# Altium PCB Handheld Receiver.PcbDoc
Units mil, origin at the board's own origin, x right, y up, seen from the top; angles counter-clockwise.
Board outline 1968.5 x 1968.5 mil, 2 copper layers (Top Layer, Bottom Layer); 28 components, 28 nets, 145 pads, 17 vias.
Unrouted connection lines stored in the file: 1.
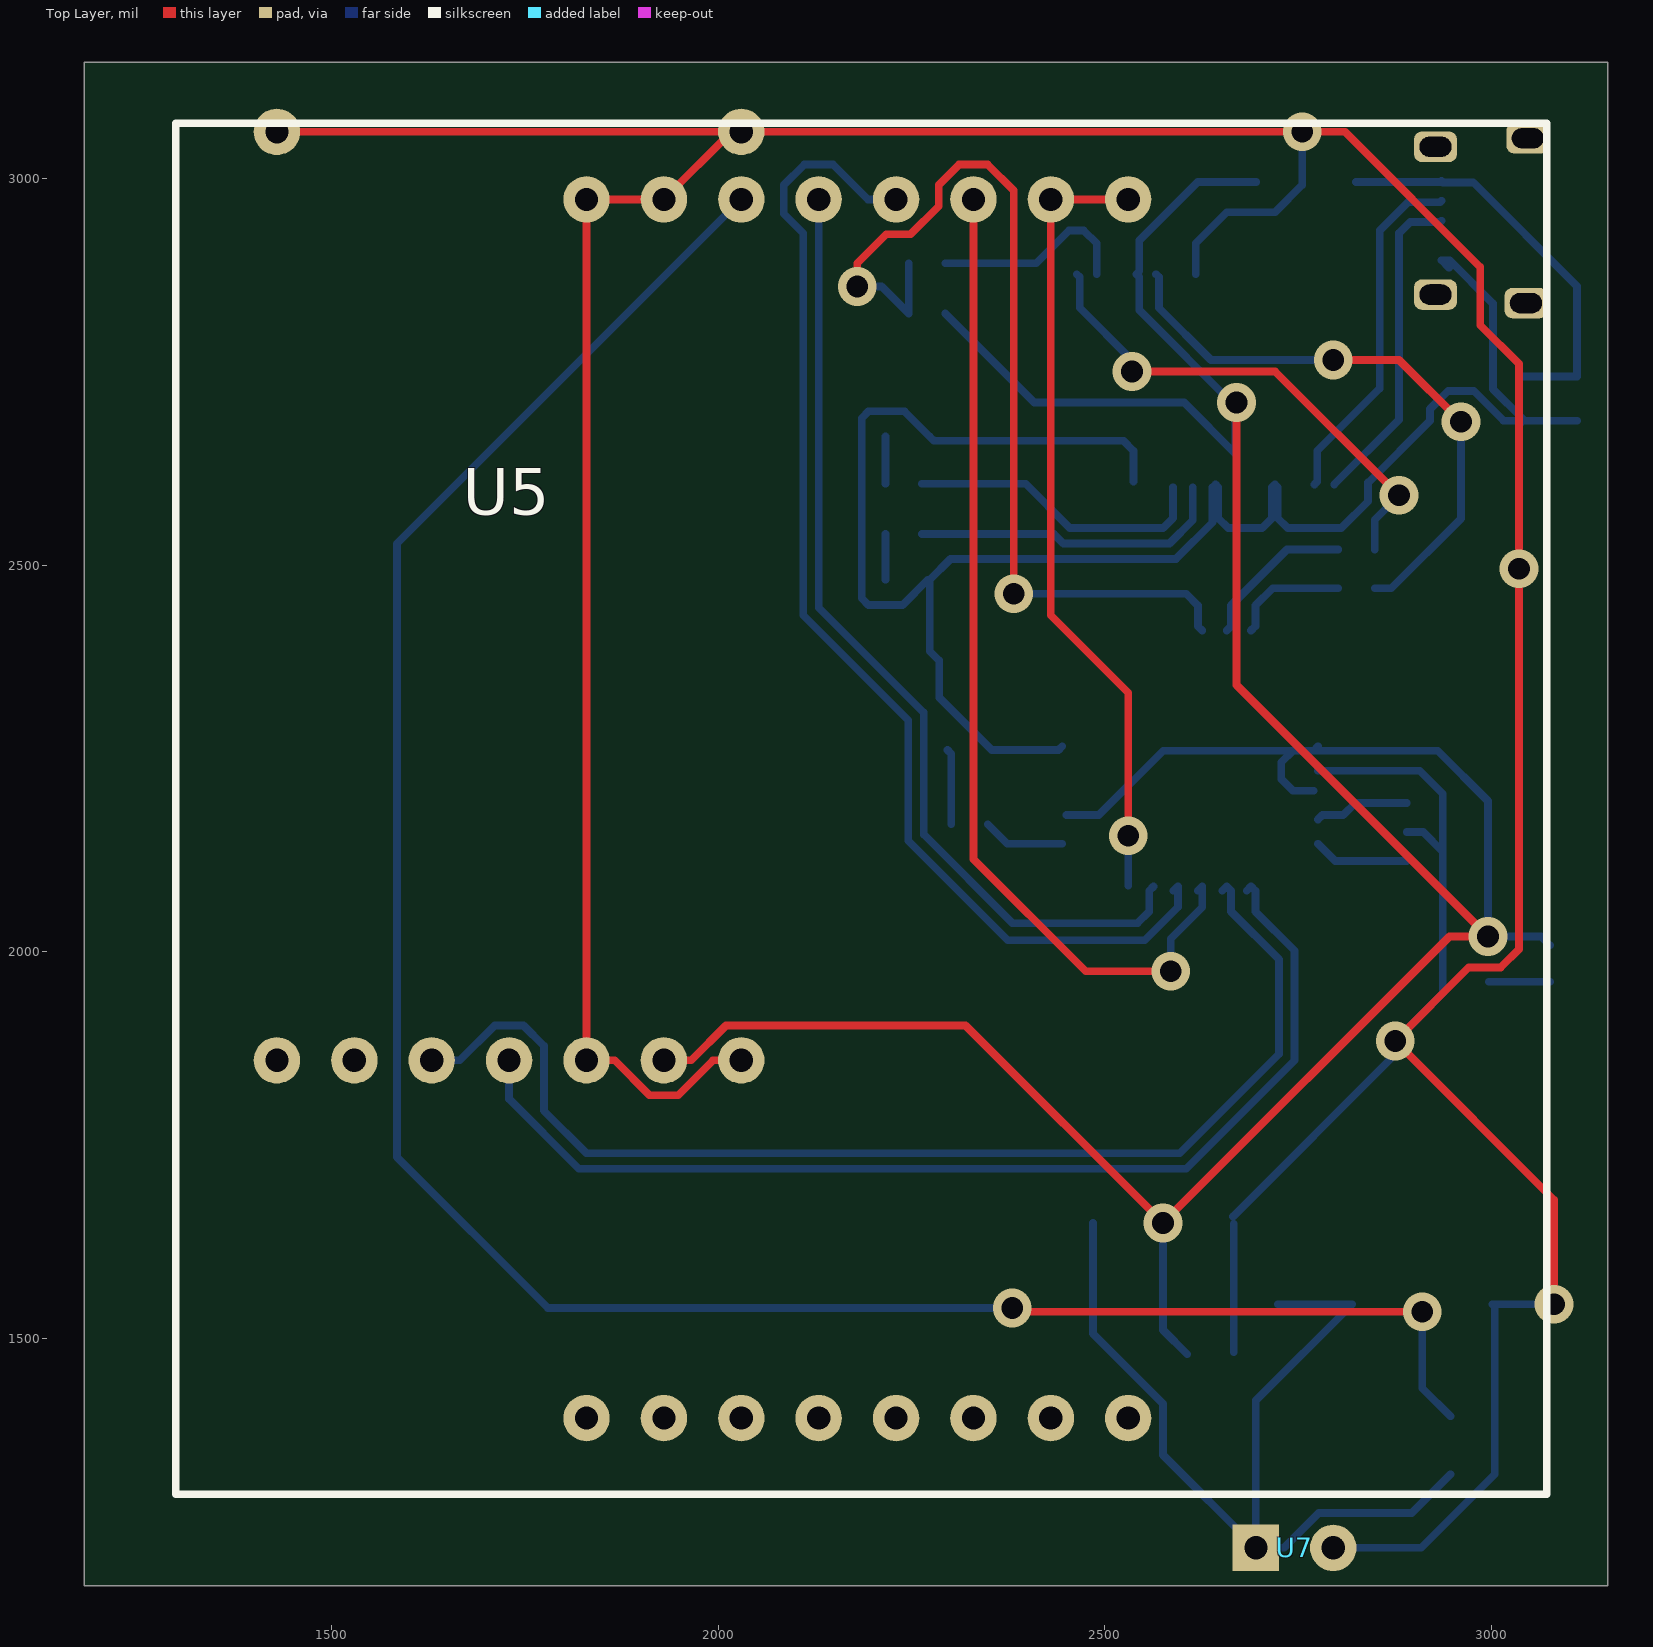
[diagram p0: Top Layer view]
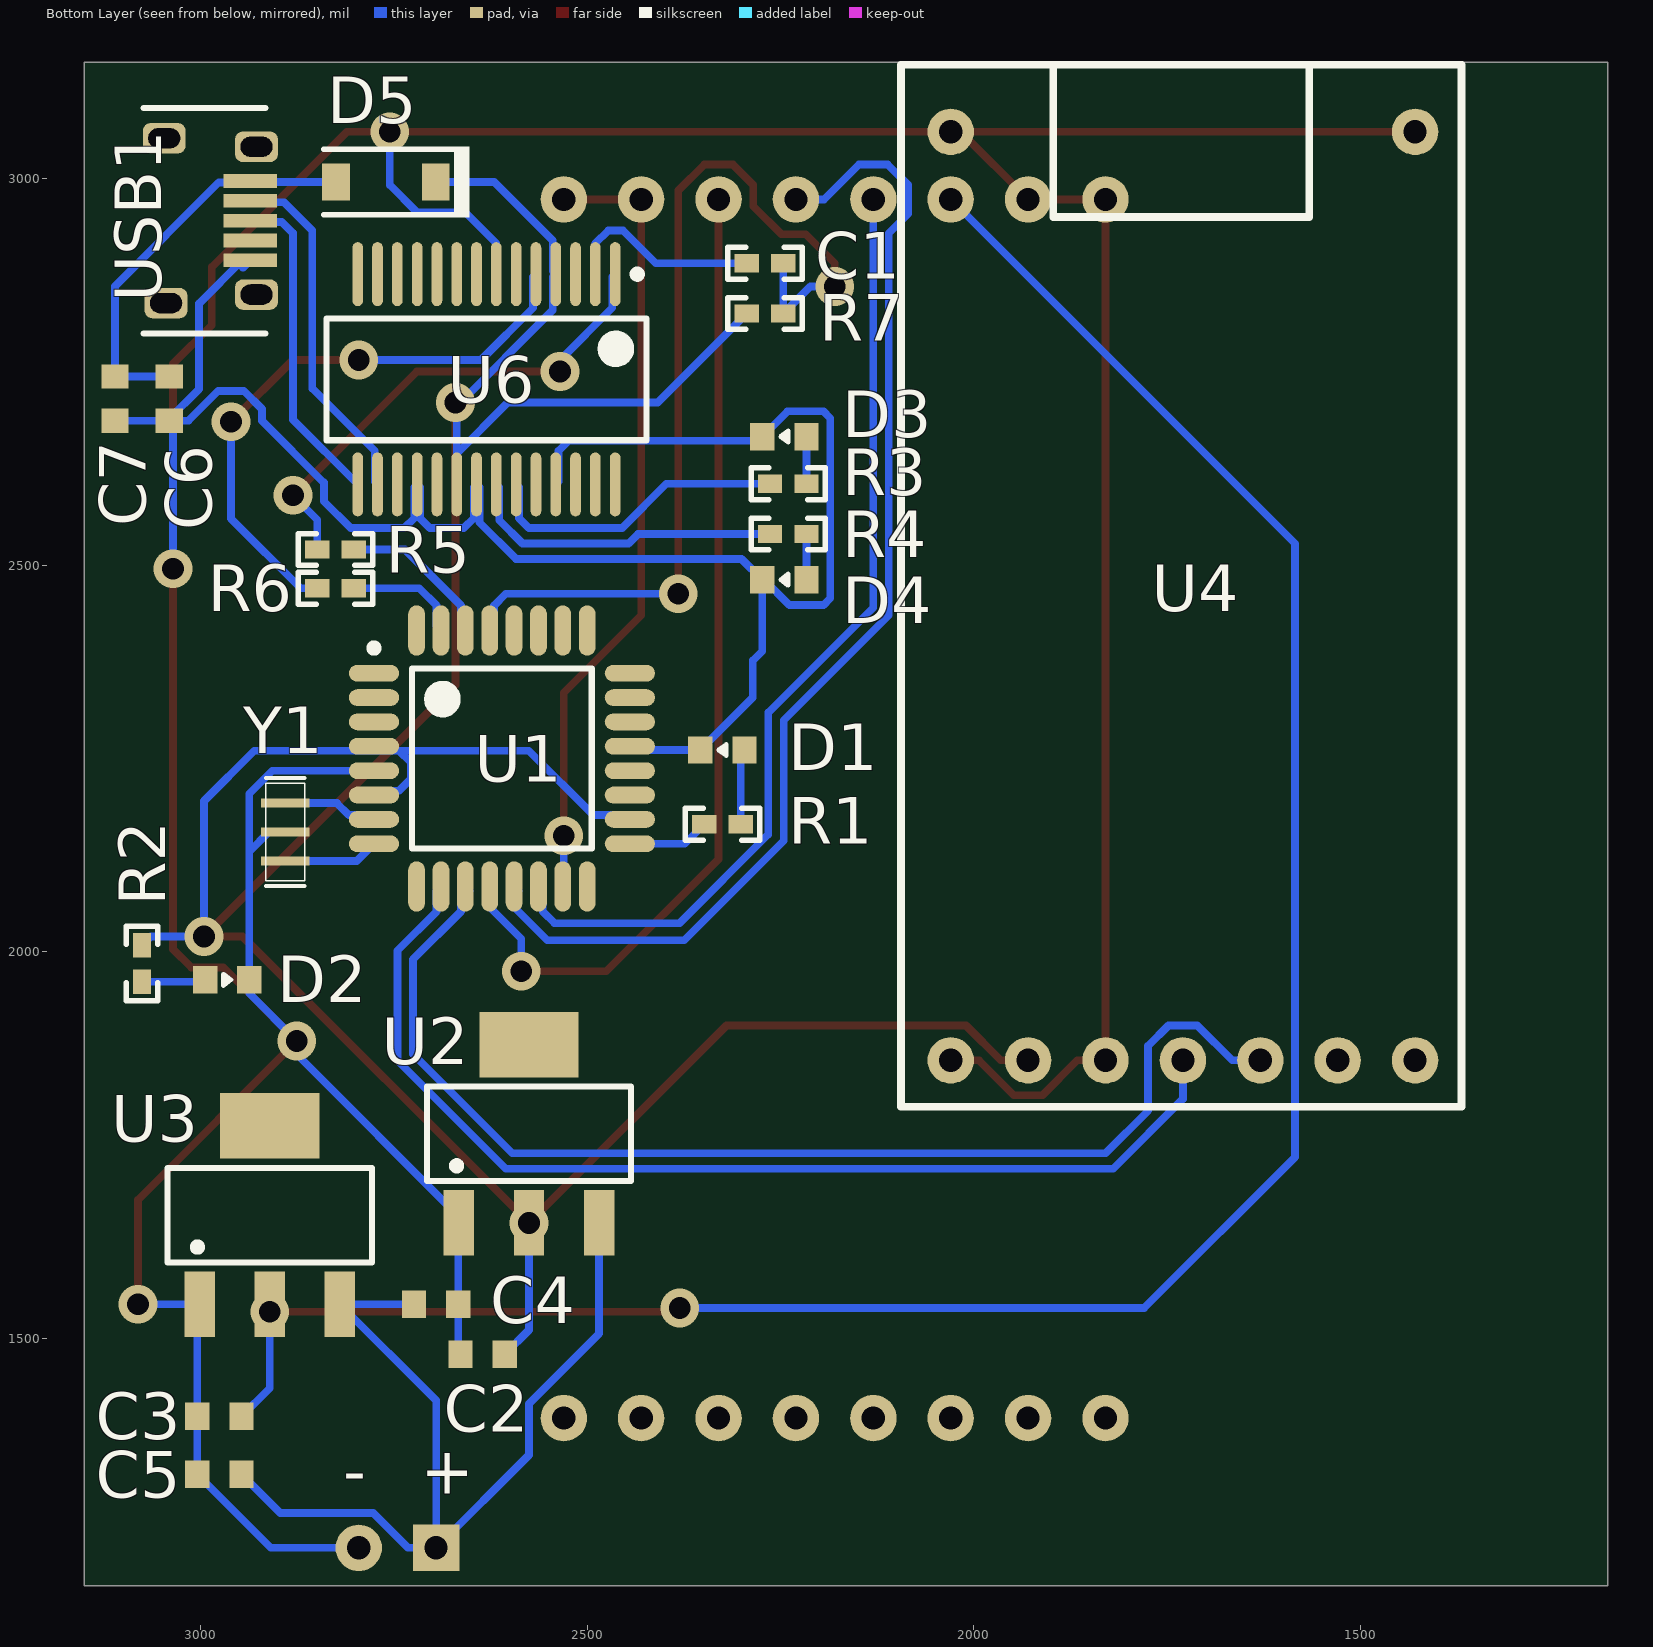
[diagram p1: Bottom Layer view, seen from below]
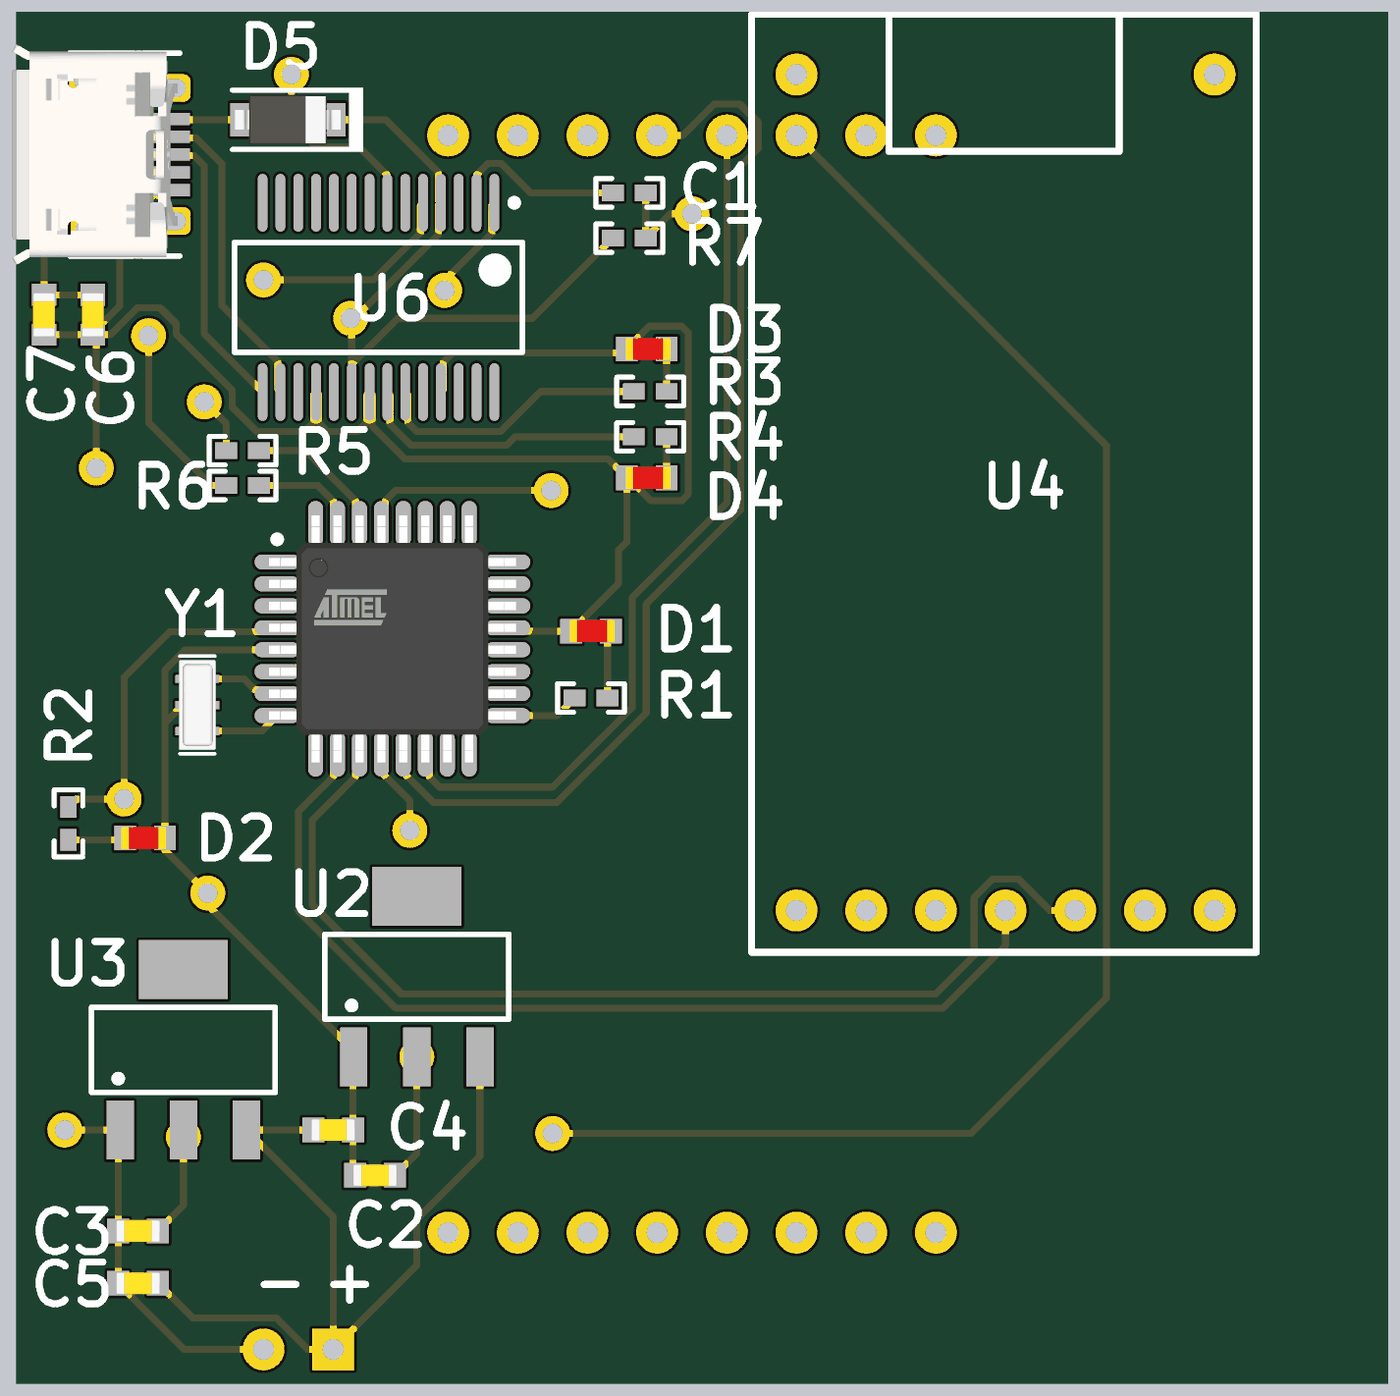
[diagram p2: 3D render of the assembled board from below, using the file's embedded part models]

## Layer stack, top to bottom
Top Solder: solder mask 0.4, Solder Resist, Dk 3.5
Top Layer: signal copper 1.4
Dielectric 1: dielectric 12.6, FR-4, Dk 4.8
Bottom Layer: signal copper 1.4
Bottom Solder: solder mask 0.4, Solder Resist, Dk 3.5

## Board outline
1181.1,1181.1 1181.1,3149.61 3149.61,3149.61 3149.61,1181.1

## Design rules (kind name [scope] priority, off if disabled: settings)
Clearance [All] p1: gap=10
PolygonConnect [All] p1: connectstyle=Relief reliefconductorwidth=10 reliefentries=4 polygonreliefangle="90 Angle" airgapwidth=10
RoomDefinition "Handheld Receiver" [InComponentClass('Handheld Receiver')] p1: confinementstyle=ConfineIn formatcopy=TRUE lockcomponents=FALSE outline 1175,1181.1 3149.61,1181.1 3149.61,3149.61 1175,3149.61
RoutingVias [All] p1: holewidth=28 width=50 viastyle="Through Hole" minholewidth=28 minwidth=50 maxholewidth=28 maxwidth=50
SolderMaskExpansion [All] p1: expansion=4
Width [All] p1: maxlimit=10 minlimit=10 preferedwidth=10
29 further rules are at their usual default settings.

## Components (designator, comment, footprint, x,y, rotation, side; value= is the part's Value field where it differs from the comment)
C1 "0.1µF" 0402 2270,2890 r0 bottom
C2 "10µF" CAP-0603 2635,1480 r0 bottom
C3 "10µF" CAP-0603 2975,1400 r0 bottom
C4 "0.1µF" CAP-0603 2695,1545 r180 bottom
C5 "0.1µF" CAP-0603 2975,1325 r0 bottom
C6 "10µF" CAP-0603 3040,2715 r270 bottom
C7 "0.1µF" CAP-0603 3110,2715 r270 bottom
D1 "Yellow" "LED 0603 Red" 2325,2260 r0 bottom
D2 "Red" "LED 0603 Red" 2965,1965 r180 bottom
D3 "Blue" "LED 0603 Red" 2245,2665 r0 bottom
D4 "Green" "LED 0603 Red" 2245,2480 r0 bottom
D5 "1N5819HW-7-F" SOD-123 2760,2995 r0 bottom
R1 "1k" 0402 2325,2165 r180 bottom
R2 "1k" 0402 3075,1985 r90 bottom
R3 "1k" 0402 2240,2605 r0 bottom
R4 "1k" 0402 2240,2540 r0 bottom
R5 "1k" 0402 2825,2520 r0 bottom
R6 "1k" 0402 2825,2470 r0 bottom
R7 "1k" 0402 2270,2825 r180 bottom
U1 "#NAME?" TQFP32 2610,2250 r180 bottom
U2 "5V Regulator" SOT233 2575,1765 r90 bottom
U3 "3.3V Regulator" SOT233 2910,1660 r90 bottom
U4 "LoRa" DRF1278DM 1370,1800 r90 bottom
U5 "Nokia 5110" NOKIA5110 2185.04,2185.04 r0 top
U6 "FT232RL" SSOP-28_N 2630,2740 r270 bottom
U7 "Battery Connector" BATTERY_PADS 2695,1230 r0 top
USB1 "USB connector" "USB MICRO-B" 2935,2945 r270 bottom
Y1 "Crystal" CSTCE 2890,2155 r270 bottom

## Footprints (in the part's own frame and the unit in brackets; to place one, negate y for a bottom-side part, rotate by r counter-clockwise, add the part's x,y. Pads: shape width x height; smd on the part's side, far side on the other; paste and mask are expansions set on the pad)
0402 [mm]
  rect 0.8x0.6 smd: 1(-0.6,0) 2(0.6,0)
  silkscreen extent -1.22,-0.52 1.22,0.52, body extent -0.55,-0.3 0.55,0.3, height 0.6
BATTERY_PADS [mil]
  rect 60x60 hole 30: 1(0,0)
  round 60 hole 30: 2(100,0)
CAP-0603 [mm] "Non-polarized 0603 (1608) chip capacitor"
  rect 0.8x0.9 smd: 1(-0.725,0) 2(0.725,0)
  body extent -0.8,-0.4 0.8,0.4, height 0.86
CSTCE [mm]
  rect 0.3x1.6 smd: 1(0,0) 2(-0.95,0) 3(0.95,0)
  silkscreen extent -1.78,-0.64 1.78,0.64, body extent -1.6,-0.64 1.6,0.66, height 1.02
DRF1278DM [mil]
  round 60 hole 30: 1(60,60) 2(60,160) 3(60,260) 4(60,360) 5(60,460) 6(60,560) 7(60,660) 7(1259.84,60) 7(1259.84,660)
  silkscreen extent 0,0 1346,724
"LED 0603 Red" [mm]
  rect 0.8x0.9 smd: 1(-0.725,-0.025) 2(0.725,-0.025)
  silkscreen extent -0.13,-0.21 0.12,0.16, body extent -0.86,-0.43 0.76,0.37, height 1.1
NOKIA5110 [mil]
  round 60 hole 30: 1(-355,787.4) 2(-255,787.4) 3(-155,787.4) 4(-55,787.4) 5(45,787.4) 6(145,787.4) 7(245,787.4) 8(345,787.4) 9(-355,-787.4) 10(-255,-787.4) 11(-155,-787.4) 12(-55,-787.4) 13(45,-787.4) 14(145,-787.4) 15(245,-787.4) 16(345,-787.4)
  silkscreen extent -886,-886 886,886
SOD-123 [mm]
  rect 0.915x1.22 smd: 1(-1.637,0) 2(1.637,0)
  silkscreen extent -2.74,-1.17 2.03,1.17, body extent -1.93,-0.9 1.93,0.9, height 1.35
SOT233 [mm] "SOT223 4-Leads"
  rect 2.15x1 smd: 1(-2.925,2.3) 2(-2.925,0) 3(-2.925,-2.3)
  rect 2.15x3.25 smd: 4(2.925,0)
  silkscreen extent -1.55,-3.35 1.55,3.35, body extent -1.85,-3.35 1.85,3.35, height 1.8
SSOP-28_N [mm] "SOP, 28-Leads, Body 10.2x5.3mm, Pitch 0.65mm, IPC Medium Density"
  oval 2.1x0.35 smd: 1(-3.45,4.225) 2(-3.45,3.575) 3(-3.45,2.925) 4(-3.45,2.275) 5(-3.45,1.625) 6(-3.45,0.975) 7(-3.45,0.325) 8(-3.45,-0.325) 9(-3.45,-0.975) 10(-3.45,-1.625) 11(-3.45,-2.275) 12(-3.45,-2.925) 13(-3.45,-3.575) 14(-3.45,-4.225) 15(3.45,-4.225) 16(3.45,-3.575) 17(3.45,-2.925) 18(3.45,-2.275) 19(3.45,-1.625) 20(3.45,-0.975) 21(3.45,-0.325) 22(3.45,0.325) 23(3.45,0.975) 24(3.45,1.625) 25(3.45,2.275) 26(3.45,2.925) 27(3.45,3.575) 28(3.45,4.225)
  silkscreen extent -3.57,-5.25 2,5.25, body extent -2.8,-5.25 2.8,5.25, height 2
TQFP32 [mm] "Thin QFP, 32-Leads, Body 7x7mm, Pitch 0.8mm, IPC Medium Density"
  oval 1.65x0.55 smd: 1(-4.2,2.8) 2(-4.2,2) 3(-4.2,1.2) 4(-4.2,0.4) 5(-4.2,-0.4) 6(-4.2,-1.2) 7(-4.2,-2) 8(-4.2,-2.8) 17(4.2,-2.8) 18(4.2,-2) 19(4.2,-1.2) 20(4.2,-0.4) 21(4.2,0.4) 22(4.2,1.2) 23(4.2,2) 24(4.2,2.8)
  oval 0.55x1.65 smd: 9(-2.8,-4.2) 10(-2,-4.2) 11(-1.2,-4.2) 12(-0.4,-4.2) 13(0.4,-4.2) 14(1.2,-4.2) 15(2,-4.2) 16(2.8,-4.2) 25(2.8,4.2) 26(2,4.2) 27(1.2,4.2) 28(0.4,4.2) 29(-0.4,4.2) 30(-1.2,4.2) 31(-2,4.2) 32(-2.8,4.2)
  silkscreen extent -4.33,-2.95 2.95,3.75, body extent -4.51,-4.51 4.51,4.51, height 1.15
"USB MICRO-B" [mm] "FCI 10103594-0001LF"
  rect 0.45x1.75 smd: 1(-1.3,0) 2(-0.65,0) 3(0,0) 4(0.65,0) 5(1.3,0)
  rrect50% 1x1.4 hole 0.66 slot 1.05 at 90 deg: SH(-2.705,-2.83) SH(-2.425,0.2) SH(2.425,0.2) SH(2.705,-2.77)
  silkscreen extent -3.7,-3.5 3.7,0.5, body extent -4.02,-5.6 4.02,0.43, height 2.89

## Part data
C1 C2 C3 C4 C5 C6 C7: library part Capacitor, "CAP"
D1 D2 D3 D4: library part LED, "LED"
D5: "Diode, Schottky, 40V, 1A, SOD-123"
R1 R2 R3 R4 R5 R6 R7: library part Resistor, "Resistor"
U1: library part ATmega328P-AU, "8-bit AVR Microcontroller, 32KB Flash, 1KB EEPROM, 2KB SRAM, 32-pin TQFP, Industrial Grade (-40°C to 85°C)"
U2 U3: library part SOT223-REG, "SOT223 regulator"
U4: library part DRF1278DM, "LoRa module"
U5: "Nokia 5110 LCD module"
U6: library part FT232RL-Reel, "USB UART Asynchronous Serial Data Transfer Chip, SSOP-28, Tape and Reel"
USB1: "USB Connector"
Y1: "16Mhz"

## Via types
v1: diameter 50, hole 28, Top Layer to Bottom Layer, 17 vias

## Nets (pads, with @x,y where several pads share a name; then routed paths per layer and width w, separated by ;. In a path a pad name is that pad's centre, name@x,y a point inside that pad or via, vN(x,y) a via of type N, cw(c..) or ccw(c..) an arc to the next point about the centre after c; other vN are vias at no path point)
3.3V: C3.1 U3.2 U5.3 | length 2982.5
  Top Layer w10: v1@2385,1535 v1(2910,1535)
  Bottom Layer w10: U5.3 1585,2527.4 1585,1735 1780,1540 v1(2380,1540) ; U3.2 v1(2910,1535) 2910,1436.46 C3.1
5V: C2.1 D5.1 R2.2 R7.1 U1.4 U1.6 U1.18 U2.2 U4.6 U6.4 U6.20 | length 4277.2
  Top Layer w10: U4.6 1965.36,1860 2010.36,1905 2319.84,1905 v1(2575,1649.84) 2945.16,2020 v1(2995,2020) 2670,2345 v1(2670,2710)
  Bottom Layer w10: R7.1 2408.62,2710 2602.37,2710 2668.39,2643.99 2668.39,2705.37 2544.13,2829.62 2544.13,2872.13 U6.4 2544.13,2879.53 2544.13,2919.34 2619.79,2995 D5.1 ; U1.18@2450.32,2176.93 2492.13,2176.93 2575.28,2260.08 2743,2260.08 ; v1(2575,1649.84) 2575,1511.46 C2.1 ; U1.6@2769.68,2208.43 2743,2208.43 2727.87,2223.55 2727.87,2244.95 2743,2260.08 ; U1.4 U1.4@2769.68,2260.08 ; R2.2 3063.62,2020 v1(2995,2020) 2995,2195 2929.92,2260.08 U1.4@2769.68,2260.08 ; 2743,2260.08 U1.4@2769.68,2260.08
GND: C2.2 C3.2 C4.2 C5.2 C6.2 C7.2 D1.2 D2.2 D3.2 D4.2 U1.5 U1.21 U2.1 U3.1 U4.5 U4.7 U5.1 U5.2 U6.7 U6.18 U6.21 U6.25 U7.2 USB1.5 Y1.1 | length 9343.4
  Top Layer w10: U4.7@1430,3059.84 U4.7@2017.44,3059.84 ; U4.7@2030,1860 1993.64,1860 1948.64,1815 1911.36,1815 1866.36,1860 U4.5 U4.5 U5.1 U5.2 U4.7@2017.44,3059.84 ; v1(3080.16,1544.84) 3080.16,1679.84 v1(2875,1885) 2970,1980 3011.57,1980 3035,2003.43 v1(3035,2495) 3035,2760 2985,2810 2985,2885 2810.16,3059.84 2030,3059.84 U4.7@2017.44,3059.84
  Bottom Layer w10: U1.21 2439.88,2260.98 D1.2 2285.7,2328.82 2285.7,2376.55 2273.54,2388.72 D4.2 ; U6.25@2536.73,2607.87 2536.73,2647.69 2523.91,2660.51 2279.01,2660.51 D3.2 2240.82,2698.7 2194.49,2698.7 2185.63,2689.84 2185.63,2457.13 2194.49,2448.27 2238.41,2448.27 2271.13,2480.98 D4.2 ; U6.7 2617.2,2915.64 2657.55,2955.98 2719.76,2955.98 2755,2991.23 v1(2755,3060) ; U6.21@2639.09,2600.47 2639.09,2555.27 2591.66,2507.83 2300.39,2507.83 D4.2 ; U6.21 2646.5,2600.47 2646.5,2560.66 2659.32,2547.83 2703.04,2547.83 2715.87,2560.66 2715.87,2600.47 U6.18 2723.27,2600.47 2723.27,2560.66 2736.09,2547.83 2805.41,2547.83 2840,2582.43 2840,2606.57 2920,2686.57 2920,2701.57 2943.43,2725 2976.57,2725 3015.11,2686.46 C6.2 ; U2.1@2665.55,1658.22 2875,1867.67 v1(2875,1885) 2936.5,1946.5 2936.5,2129.72 ; C2.2@2666.46,1482.91 C4.2 U2.1@2666.46,1648.94 ; U1.5 2906.76,2234.25 2936.5,2204.52 2936.5,2129.72 ; U7.2 2908.54,1230 C5.2 C3.2 3003.54,1541.85 U3.1 v1(3080.16,1544.84) ; Y1.1 2911.21,2155 2936.5,2129.72 ; 2944.61,2884.21 USB1.5 2945.53,2893.82 3001.5,2837.85 3001.5,2727.37 3040,2688.87 C6.2 ; v1(3035,2495) 3035,2681.46 C6.2 ; C7.2 C6.2
NetC1_2: C1.2 U6.2 | length 259.8
  Bottom Layer w10: C1.2 2411.24,2890 2453.4,2932.17 2472.73,2932.17 2489.25,2915.64 U6.2
NetD1_1: D1.1 R1.2 | length 98
  Bottom Layer w10: D1.1 2301.38,2256.06 R1.2
NetD2_1: D2.1 R2.1 | length 78.8
  Bottom Layer w10: D2.1@2996.19,1961.38 R2.1
NetD3_1: D3.1 R3.1 | length 60.9
  Bottom Layer w10: R3.1@2216.45,2605.07 D3.1
NetD4_1: D4.1 R4.1 | length 58.9
  Bottom Layer w10: D4.1@2216.38,2481.06 R4.1
NetR1_1: R1.1 U1.17 | length 106.5
  Bottom Layer w10: R1.1 2373.86,2139.76 U1.17
NetR3_2: R3.2 U6.23 | length 393.1
  Bottom Layer w10: R3.2 2397.43,2605 2454.59,2547.83 2575.09,2547.83 2587.91,2560.66 U6.23@2587.91,2600.47
NetR4_2: R4.2 U6.22 | length 409.9
  Bottom Layer w10: R4.2 2434.14,2540 2446.31,2527.83 2583.37,2527.83 2613.5,2557.96 U6.22@2613.5,2600.47
NetR5_1: R5.1 U1.30 | length 203.1
  Bottom Layer w10: U1.30 2662.91,2421.02 2662.91,2447.71 2735.21,2520 R5.1
NetR6_1: R6.1 U1.31 | length 150.9
  Bottom Layer w10: U1.31 2694.41,2421.02 2694.41,2447.71 2716.7,2470 R6.1
NetU1_7: U1.7 Y1.2 | length 123.4
  Bottom Layer w10: U1.7 2781.02,2176.93 2807.71,2176.93 2823.18,2192.4 Y1.2
NetU1_8: U1.8 Y1.3 | length 123.8
  Bottom Layer w10: U1.8 2797.52,2117.6 Y1.3
NetU1_10: U1.10 U4.4 | length 1416.2
  Bottom Layer w10: U4.4 1730,1810 1820,1720 2605,1720 2745,1860 2745,2001.7 2694.41,2052.29 2694.41,2078.98 U1.10 U1.10@2683.07,2078.98
NetU1_11: U1.11 U4.3 | length 1536.6
  Bottom Layer w10: U4.3 1666.36,1860 1711.36,1905 1748.64,1905 1775,1878.64 1775,1795 1830,1740 2596.72,1740 2725,1868.28 2725,1990.21 2662.91,2052.29 2662.91,2078.98 U1.11 U1.11@2651.57,2078.98
NetU1_12: U1.12 U5.6 | length 1312
  Top Layer w10: U5.6 2330.04,2119.96 2475,1975 v1(2585,1975) v1@2595,1975
  Bottom Layer w10: v1(2585,1975) 2585,2017.22 2625.75,2057.96 U1.12 U1.12@2620.08,2078.98
NetU1_13: U1.13 U5.5 | length 1542.9
  Bottom Layer w10: U5.5 2193.68,2972.44 2148.68,3017.44 2111.4,3017.44 2085.04,2991.08 2085.04,2953.8 2110.04,2928.8 2110.04,2434.96 2245.7,2299.3 2245.7,2143.62 2374.32,2015 2551.29,2015 2594.25,2057.96 U1.13 U1.13@2588.58,2078.98
NetU1_14: U1.14 U5.4 | length 1256.6
  Bottom Layer w10: U5.4 2130.04,2444.96 2265.7,2309.3 2265.7,2151.9 2380.44,2037.17 2541.96,2037.17 2557.09,2052.29 2557.09,2078.98 U1.14
NetU1_15: U1.15 U1.16 U5.7 U5.8 | length 1028
  Top Layer w10: v1(2530.04,2150.04) 2530.04,2334.96 2430.04,2434.96 U5.7 U5.8
  Bottom Layer w10: U1.15@2530.04,2085.87 v1(2530.04,2150.04)
NetU6_15: U6.15 USB1.3 | length 421.1
  Bottom Layer w10: U6.15 2880,2687.83 2880,2928.93 2894.34,2943.27 2933.27,2943.27 USB1.3
NetU6_16: U6.16 USB1.2 | length 458.8
  Bottom Layer w10: U6.16 2774.45,2607.87 2774.45,2647.69 2855,2728.24 2855,2932.21 2891.64,2968.86 2933.27,2968.86 USB1.2
RESET: C1.1 R7.2 U1.29 | length 1260.7
  Top Layer w10: v1(2180,2860) 2180,2890 2217.44,2927.44 2248.68,2927.44 2285.04,2963.8 2285.04,2991.08 2311.4,3017.44 2348.68,3017.44 2382.17,2983.95 v1(2382.17,2462.83)
  Bottom Layer w10: v1(2180,2860) 2211.38,2860 R7.2 C1.1 ; v1(2382.17,2462.83) 2604.95,2462.83 2620.08,2447.71 2620.08,2421.02 U1.29
RX: R5.2 U6.1 | length 649.6
  Top Layer w10: v1(2535,2750) 2720,2750 v1(2880,2590)
  Bottom Layer w10: U6.1 2467.36,2872.13 2467.36,2832.31 2535,2764.67 v1(2535,2750) ; R5.2 2848.62,2558.62 v1(2880,2590)
TX: R6.2 U6.5 | length 770
  Top Layer w10: v1(2795,2765) 2880,2765 v1(2960,2685)
  Bottom Layer w10: U6.5 2569.72,2872.13 2569.72,2832.31 2637.04,2765 v1(2795,2765) ; R6.2 2870,2470 2960,2560 v1(2960,2685)
VCC: C4.1 C5.1 U2.3 U3.3 U7.1 | length 1260
  Bottom Layer w10: U2.3 2484.45,1506.91 2575.04,1416.32 2575.04,1349.96 U7.1 ; C4.1@2723.7,1544.84 U3.3 2695,1420.39 U7.1 ; C5.1 2896.46,1275 2776.36,1275 2731.36,1230 U7.1
VUSB: C6.1 C7.1 D5.2 USB1.1 | length 529
  Bottom Layer w10: D5.2 2933.82,2995 USB1.1 2936.73,2994.45 2975.66,2994.45 3110,2860.11 C7.1 C6.1
pads on no net: U1.1 U1.2 U1.3 U1.9 U1.19 U1.20 U1.22 U1.23 U1.24 U1.25 U1.26 U1.27 U1.28 U1.32 U2.4 U3.4 U4.1 U4.2 U5.9 U5.10 U5.11 U5.12 U5.13 U5.14 U5.15 U5.16 U6.3 U6.6 U6.8 U6.9 U6.10 U6.11 U6.12 U6.13 U6.14 U6.17 U6.19 U6.24 U6.26 U6.27 U6.28 USB1.4 USB1.SH

## Silkscreen, mask and mechanical layers (free items; w line width, h text height)
Mechanical 1:
  lines w10: 1105,1145.55 1105,1145.55 ; 1181.1,1181.1 3149.61,1181.1 3149.61,3149.61 1181.1,3149.61 1181.1,1181.1

## Text inside footprints (layer, text, board x,y; h text height)
U7: Bottom Overlay "+" at 2715,1300 h60; Bottom Overlay "-" at 2815,1300 h60